# Altium PCB CH564L-R0-1v0.PcbDoc (part 2 of 2)
Units mil, origin at the board's own origin, x right, y up, seen from the top; angles counter-clockwise.
Board outline 2874.02 x 3543.31 mil, 2 copper layers (Top Layer, Bottom Layer); 51 components, 114 nets, 380 pads, 529 vias.
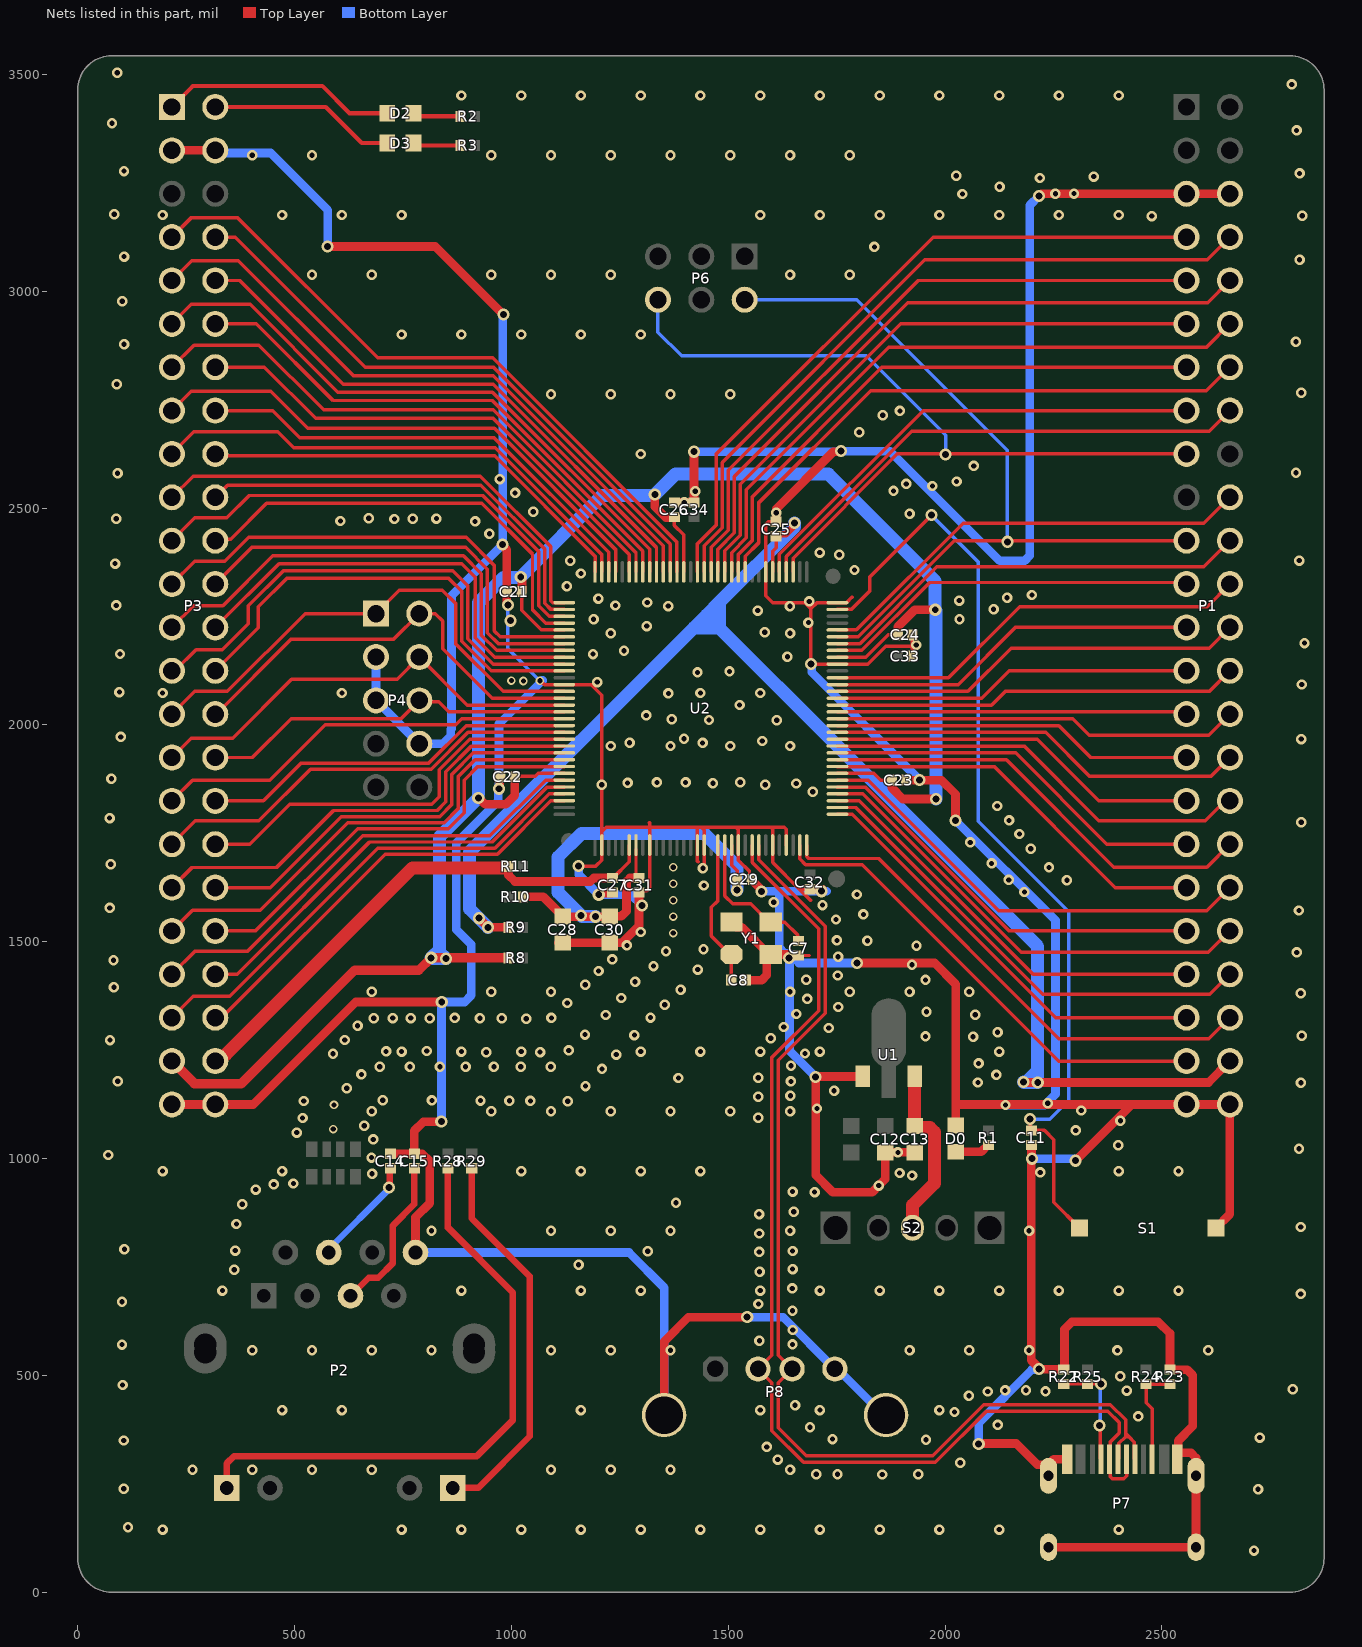
[diagram p2: the nets of this part, all layers, seen from the top]

## Via types
v1: diameter 24, hole 12, Top Layer to Bottom Layer, tented both sides, 447 vias
v2: diameter 28, hole 16, Top Layer to Bottom Layer, tented both sides, 72 vias
v3: diameter 20, hole 12, Top Layer to Bottom Layer, tented both sides, 10 vias

## Nets (pads, with @x,y where several pads share a name; then routed paths per layer and width w, separated by ;. In a path a pad name is that pad's centre, name@x,y a point inside that pad or via, vN(x,y) a via of type N, cw(c..) or ccw(c..) an arc to the next point about the centre after c; other vN are vias at no path point) (continued)
GND: C7.1 C8.1 C11.1 C12.2 C13.2 C14.1 C15.2 C21.1 C22.1 C23.2 C24.2 C25.2 C26.2 C27.1 C28.1 C29.1 C30.1 C31.1 C32.1 C33.2 C34.2 D0.2 P1.5 P1.6 P1.47 P1.48 P2.8 P3.3 P3.4 P3.47 P3.48 P4.3 P4.5 P4.8 P7.0 P7.A1 P7.B1 P8.0 P8.4 R22.2 R23.2 S1.2 U1.1 U2.2 U2.9 U2.16 U2.17 U2.22 U2.27 U2.29 U2.55 U2.64 U2.71 U2.109 Y1.2 Y1.4 | length 19821.6
  Top Layer w8: v3(1065.73,2101.79) 1067.79,2101.79 1076.42,2093.16 U2.109@1122.05,2093.16 1184.38,2093.16 1208.66,2068.88 1208.66,1753.51 ; v2(1155.07,1674.74) 1194.97,1674.74 1208.66,1688.44 U2.2@1208.66,1723.08 1208.66,1753.51 ; C31.1@1295.77,1615.42 1298.18,1617.84 1312.67,1617.84 1318.9,1624.07 U2.9@1318.9,1723.08 1318.9,1763.84 ; 1318.32,1774.93 1318.9,1774.35 1318.9,1763.84 ; 1431.01,1684.18 1429.13,1686.06 U2.16@1429.13,1723.08 1429.13,1763.84 ; v1@1444.74,1677.95 1444.88,1678.1 U2.17@1444.88,1723.08 1444.88,1757.47 1438.51,1763.84 ; C29.1@1553.91,1643.87 1549.11,1648.68 1549.11,1662.27 1523.62,1687.76 U2.22@1523.62,1723.08 1523.62,1758.2 1517.98,1763.84 ; C25.2@1610.59,2468.41 1592.2,2468.41 1586.61,2462.83 U2.71@1586.61,2353 1586.61,2298.42 1602.96,2282.07 1676.98,2282.07 1690.8,2268.26 ; U2.29@1633.86,1723.08 1633.86,1759.16 1629.17,1763.84 1597.68,1763.84 ; C7.1@1662.32,1468.41 1687.32,1468.41 ; C32.1@1688.24,1621.15 1664.12,1621.15 ; 1690.18,1595.33 1689.94,1595.33 1664.12,1621.15 ; 1786.18,2294.34 1785.11,2294.34 1772.9,2282.13 U2.64@1751.97,2282.13 1704.67,2282.13 1690.8,2268.26 ; C33.2@1924.6,2158.79 v1@1924.6,2183.22 ; C24.2@1924.6,2207.66 v1@1924.6,2183.22 ; 1208.66,1753.51 1219,1763.84 1318.9,1763.84 ; 1318.9,1763.84 1429.13,1763.84 ; 1429.13,1763.84 1438.51,1763.84 ; 1438.51,1763.84 1517.98,1763.84 ; 1517.98,1763.84 1597.68,1763.84 ; 1597.68,1763.84 1602.36,1759.16 U2.27@1602.36,1723.08 1602.36,1682.91 1664.12,1621.15 ; 1690.8,2268.26 v2(1690.8,2140.38) U2.55@1751.97,2140.4 1822.18,2140.4 1863.36,2181.59 1922.96,2181.59 v1@1924.6,2183.22
  Top Layer w20: P3.47@217.17,1125 P3.48@317.17,1125 404.94,1125 641.27,1361.34 v2(839.51,1361.34) ; P3.3@217.17,3325 P3.4@317.17,3325 ; v2(576.31,3103.49) 824.76,3103.49 v2(981.98,2946.26) ; C14.1@721.24,1011.19 C15.2@776.24,1011.19 ; P2.8@778.98,783.58 778.98,864.62 811.48,897.12 811.48,993.82 794.11,1011.19 C15.2@776.24,1011.19 ; v2(838.45,1085.33) 797.29,1085.33 776.24,1064.28 C15.2@776.24,1011.19 ; v2(971.31,1852.9) 972.84,1854.43 972.84,1878.36 C22.1@974.53,1880.05 ; v2(979.91,2416) 979.91,2413.84 989.53,2404.22 989.53,2308.13 C21.1@990.02,2307.64 ; C21.1@989.53,2307.64 989.53,2279.67 v2(992.13,2277.07) ; C28.1@1108.51,1497.98 C28.1@1118.7,1497.98 C30.1@1227.08,1497.98 1254.95,1497.98 1294.27,1537.3 C31.1@1294.27,1613.74 ; v2(1201.51,1608.61) 1203.68,1608.61 1207,1611.93 1231.46,1611.93 C27.1@1233.27,1613.74 ; P8.0@1352.24,408.7 1352.24,578.25 1408.54,634.56 v2(1543.84,634.56) ; C26.2@1375.94,2513.21 v1(1398.56,2513.21) C34.2@1421.18,2513.21 1421.18,2630.01 v2(1421.35,2630.17) ; Y1.4@1507.48,1545.47 1519.14,1533.82 1530.95,1533.82 1594.1,1470.67 Y1.2@1598.03,1470.67 ; C8.1@1540.43,1411.56 1577.45,1411.56 1589.16,1423.28 1589.16,1461.8 Y1.2@1598.03,1470.67 ; C29.1@1553.91,1643.87 1553.91,1642.89 1576.77,1620.03 v2(1576.77,1615.62) ; C25.2@1610.59,2468.41 v1(1610.59,2489.22) 1610.59,2498.12 1742.48,2630.01 1758.55,2630.01 v2(1760.08,2631.54) ; v2@1637.63,1470.67 Y1.2@1598.03,1470.67 ; C32.1@1688.24,1621.15 v2@1717.48,1621.15 ; v2(1796.75,1451.24) 1976,1451.24 2025,1402.25 2025,1127.71 ; U1.1@1810,1190 1809.23,1189.22 1702.49,1189.22 v2(1701.71,1188.45) 1701.71,962.22 1741.18,922.75 1831.9,922.75 v1(1846.95,937.8) 1862,952.85 C12.2@1862,1014.37 v1(1891.29,1014.37) C13.2@1930,1014.37 ; C23.2@1910.56,1872.78 v2(1941.56,1872.78) 1992.09,1872.78 2024.25,1840.62 v2(2024.25,1779.82) ; D0.2@2025,1076.38 2025,1127.71 ; v2(2077.7,342.33) 2078.62,343.25 2164,343.25 2213.38,293.86 2229.79,293.86 P7.0@2238.74,284.92 ; v2(2200.59,999.86) 2199.78,1000.66 2199.78,1030.73 C11.1@2198.97,1031.54 2198.97,535.07 2217.51,516.53 2217.51,514.37 2272.84,514.37 R22.2@2273.74,513.46 2275.38,515.1 2275.38,606.81 2292.67,624.09 2491.19,624.09 2518.74,596.55 R23.2@2518.74,513.46 2558.33,513.46 2571.5,500.29 2571.5,383.3 2537.6,349.4 P7.B1@2537.6,321.52 ; v2(2216.91,3219.9) 2222.01,3225 P1.5@2556.85,3225 P1.6@2656.85,3225 ; P7.0@2238.74,103.94 P7.0@2578.9,103.94 2578.9,309.8 2567.18,321.52 P7.B1@2537.6,321.52 ; P7.0@2238.74,268.5 P7.0@2238.74,284.92 ; P7.A1@2281.85,306.69 2250.92,306.69 2238.74,294.51 P7.0@2238.74,284.92 ; v2(2300.72,995.24) 2430.48,1125 ; P7.B1@2535.79,306.69 2535.79,319.71 P7.B1@2537.6,321.52 ; S1.2@2625,840 2656.85,871.85 P1.48@2656.85,1125 P1.47@2556.85,1125 2430.48,1125 ; 2025,1127.71 2027.71,1125 2430.48,1125
  Bottom Layer w8: v2(992.13,2277.07) 992.13,2175.39 v3@1061.81,2105.71
  Bottom Layer w20: P3.4@317.17,3325 323.37,3318.79 444.84,3318.79 576.31,3187.32 v2(576.31,3103.49) ; P4.3@687.72,2156.77 P4.5@687.72,2056.77 P4.8@787.72,1956.77 842.59,1956.77 860.18,1974.36 860.18,1989.77 861.99,1991.59 861.99,2298.08 v2(979.91,2416) 979.91,2944.19 v2(981.98,2946.26) ; P2.8@778.98,783.58 1271.17,783.58 1352.24,702.51 P8.0@1352.24,408.7 ; v2(838.45,1085.33) 838.98,1085.86 838.98,1360.81 v2(839.51,1361.34) 892.63,1361.34 907.73,1376.44 907.73,1493.6 872.95,1528.38 872.95,1727.91 969.94,1824.9 969.94,1851.52 v2(971.31,1852.9) 971.31,2002.2 v3@1071.81,2102.71 ; v2(1155.07,1674.74) 1155.07,1655.05 v2(1201.51,1608.61) 1276.73,1608.61 v2(1301.47,1583.87) ; v2(1421.35,2630.17) 1758.71,2630.17 v2(1760.08,2631.54) 1873.32,2631.54 2125.84,2379.02 2183.65,2379.02 2195.36,2390.73 2195.36,3198.36 v2(2216.91,3219.9) ; v2(1543.84,634.56) 1626.38,634.56 P8.4@1745.94,515 1751.84,515 1858.14,408.7 P8.0@1864.05,408.7 ; v2(1576.77,1615.62) 1577.85,1616.7 1617.72,1616.7 ; v2(1690.8,2140.38) 1692.33,2138.85 1692.33,2122.02 v2(1941.56,1872.78) ; v2(1701.71,1188.45) 1641.43,1248.74 v2@1641.43,1472.85 ; v2@1727.09,1616.7 v2(1715.09,1616.7) 1617.72,1616.7 ; v2(1796.75,1451.24) 1663.03,1451.24 v2@1641.43,1472.85 ; v2(2024.25,1779.82) 2254.62,1549.45 2254.62,1148.32 2229.78,1123.48 2139.63,1123.48 v1(2139.46,1123.66) ; v2(2077.7,342.33) 2077.7,391.08 2200.36,513.74 2215.08,513.74 v2(2216.61,515.27) ; v2(2200.59,999.86) 2296.11,999.86 v2(2300.72,995.24) ; 1617.72,1616.7 1617.72,1486.32 1631.19,1472.85 v2@1641.43,1472.85
  other v1: 2712.58,96.23 195.79,144.57 746.97,144.57 884.77,144.57 1022.56,144.57 1160.36,144.57 1298.15,144.57 1435.95,144.57 1573.74,144.57 1711.54,144.57 1849.33,144.57 1987.13,144.57 2124.92,144.57 2400.51,144.57 116.04,149.74 2721.88,237.66 106.3,238.77 1703.11,272.1 1752.12,272.1 1855.32,271.58 1938.39,272.1 264.69,282.36 402.48,282.36 540.28,282.36 678.07,282.36 1091.46,282.36 1229.25,282.36 1367.05,282.36 1642.64,282.36 2035.03,298.58 1614.16,305.91 1588.77,335.25 106.3,350.06 1956.05,351.61 1740.53,353.3 2725.6,356.75 1688.63,380.39 2121.61,385.87 2445.79,405.55 2021.95,415.76 471.38,420.16 609.17,420.16 1160.36,420.16 1573.74,420.16 1711.54,420.16 1987.13,420.16 1654.22,431.16 2055.13,452.99 2098.62,462.94 2231.7,463.31 2418.85,465.09 2138.44,465.52 2186.73,465.89 2801.9,468.4 103.52,478.04 2404.07,498.11 402.48,557.95 540.28,557.95 678.07,557.95 815.87,557.95 1091.46,557.95 1229.25,557.95 1367.05,557.95 1918.23,557.95 2056.02,557.95 2193.82,557.95 2397.55,557.65 2607.21,557.95 102.12,571.24 1648.23,571.61 1571.92,580.16 1648.68,604.84 1648.23,649.16 1569.69,664.7 102.12,670.01 2820.5,687.97 333.58,695.75 884.77,695.75 1160.36,695.75 1298.15,695.75 1573.74,695.75 1711.54,695.75 1849.33,695.75 1987.13,695.75 2124.92,695.75 2262.72,695.75 2400.51,695.75 2538.31,695.75 1647.65,700.73 1572.36,739 361.04,743.87 1648.46,745.31 1155.09,755.1 1571.47,784.83 1314.62,786.57 1648.46,787.09 363.49,788.01 107.69,791.03 1571.58,827.4 815.87,833.54 1091.46,833.54 1229.25,833.54 1367.05,833.54 1642.64,833.54 2193.82,833.54 2820.5,842.42 365.95,849.3 1571.17,872.16 1651.27,877.46 379.4,894.62 1379.73,898.34 1699.34,922.71 1648.46,924.05 410.61,928.49 452.02,940.66 497.42,942.69 1924.07,961.07 678.93,965.11 1895.19,966.8 2219.8,968.27 195.79,971.34 471.38,971.34 1022.56,971.34 1160.36,971.34 1298.15,971.34 1435.95,971.34 2400.51,971.34 2538.31,971.34 677.42,1002.49 70.49,1008.34 2816.38,1022.6 2399.45,1030.9 681.57,1044.4 505.14,1060.07 2301.53,1065.02 660.87,1075.79 2404.33,1087.49 518.49,1093.62 1569.39,1094.16 678.07,1109.13 953.66,1109.13 1091.46,1109.13 1229.25,1109.13 1367.05,1109.13 1504.84,1109.13 1642.64,1109.13 2314.34,1110.97 1704.79,1115.67 2237.02,1127.57 1130.2,1132.1 521.15,1132.9 995.51,1133.44 1043.89,1133.21 816.65,1134.34 928.83,1133.89 703.29,1134.68 1569.39,1142.84 1643.54,1144.89 1744.24,1156.41 620.44,1162.08 1170.96,1167.29 2820.72,1174.75 2075.79,1175.63 92.12,1178.21 1644.66,1178.09 1385.16,1185.93 1569.08,1186.6 2118.59,1193.18 654.12,1194.19 1208.92,1206.99 696.57,1211.93 765.92,1211.93 835.27,1211.93 894.42,1211.93 959.7,1211.93 1021.57,1211.93 1090.92,1211.93 1644.73,1214.32 2077.44,1219.52 1241.9,1239.96 588.78,1241.81 1677.21,1242.45 941.92,1245.16 1066.26,1245.62 711.13,1247.3 746.97,1246.93 884.77,1246.93 1022.56,1246.93 1298.15,1246.93 1435.95,1246.93 1573.74,1246.93 1711.54,1246.93 2124.92,1246.93 805.08,1248.16 1132.49,1249.62 74.46,1273.23 615.71,1273.59 1598.1,1277.76 2064.82,1280.97 1954.94,1281.95 2822.59,1283.43 1283.78,1284.96 1169.78,1286.02 2121.34,1291.4 1731.88,1301.27 1628.11,1303.59 645.45,1306.38 1034.51,1322.48 811.85,1323.49 927.35,1323.49 977.94,1323.49 682.44,1323.54 726.5,1324 767.9,1324 869.6,1324.51 1092.41,1324.54 1320.91,1325.32 1217.78,1331.24 2069.76,1332 1657.26,1333.52 1957.21,1338.67 1753.98,1349.7 1353.88,1354.63 1128.93,1358.81 1682.29,1368.35 1253.48,1370.51 2820.1,1381.55 678.07,1384.72 953.66,1384.72 1091.46,1384.72 1642.64,1384.72 1780.43,1384.72 1918.23,1384.72 2056.02,1384.72 1390.19,1389.61 83.36,1395.37 1170.41,1400.74 1285.21,1407.79 1955.08,1412.11 1679.97,1412.73 1752.46,1422.33 1201.07,1432.75 1429.83,1435.91 1327.66,1443.89 1923.81,1447.22 82.55,1457.65 1232.63,1459.35 1753.44,1465.4 2811.18,1475.51 1356.61,1478 1443.05,1482.98 1934.24,1491.12 1266.44,1491.81 1750.73,1503.26 1820.93,1502.64 1298.15,1522.52 1748.63,1551.35 1811.85,1563.17 2816.14,1572.22 73.66,1578.16 1717.37,1584.71 1604.92,1591.39 1796.72,1609.18 2183.15,1614.94 1444.04,1629.84 2281.05,1641.95 2146.91,1642.82 1441.72,1669.54 2239.69,1671.66 76.32,1679.03 2107.32,1680.73 2197.74,1714.77 2058.26,1729.23 2171.53,1748.55 2821.47,1775.63 2147.64,1780.01 73.49,1785.32 2120.26,1813.22 1695.06,1846.12 1208.5,1862.16 1585.57,1862.26 1656.81,1865.07 1268.01,1866.38 1464.71,1865.54 1335.55,1867.65 1401.82,1867.65 1527.6,1868.07 77.74,1876.03 1229.25,1951.57 1367.05,1951.57 1504.84,1951.57 1642.64,1951.57 1272.53,1959.24 1440.99,1958.76 1578.56,1962.98 2821.59,1967.46 1398.18,1968.24 99,1972.4 1612.14,2010.8 1455.67,2011.55 1369.91,2013.06 1310.83,2022.15 1526.38,2046.16 1362.12,2072.76 195.79,2073.7 609.17,2073.7 1435.95,2073.7 1573.74,2073.7 96.16,2075.86 2822.51,2093.28 1197.9,2098.77 1429.14,2121.31 1503.06,2123.64 1636.63,2157.52 1188.27,2163.44 97.58,2163.72 1259.82,2171.01 1933.83,2184.32 2828.94,2188.79 1229.25,2211.5 1642.64,2211.5 1584.06,2213.74 1312.11,2228.11 1685.04,2236.12 1189.65,2243.93 2033.41,2243.87 1567.93,2263.71 2111.91,2266.76 1361.64,2274.2 1642.36,2273.6 89.08,2275.69 1239.87,2275.58 1313.48,2282.46 1687.12,2285.05 2032.94,2286.85 1200.66,2291.4 2143.22,2293.4 2200.3,2299.72 1128.03,2319.78 1160.36,2349.29 1791.16,2357.44 86.24,2372.06 1135.72,2378.92 2816.69,2379.02 1756.16,2392.69 1710.92,2397.44 949.43,2441.02 916.31,2469.4 605.73,2470.46 730.28,2474.91 772.54,2475.47 89.08,2475.51 827.03,2476.02 671.34,2476.58 1918.23,2487.09 1050.56,2491.88 1008.57,2535.05 1423.92,2538.87 1881.26,2539.81 1970.93,2551.14 1910.52,2555.86 2026.62,2561.52 973.09,2566.98 91.91,2580.39 2809.32,2581.72 2066.26,2597.39 1298.15,2624.88 1802.03,2675.01 1856.3,2714.28 1895.94,2724.28 1091.46,2762.68 1229.25,2762.68 1367.05,2762.68 1504.84,2762.68 2821.61,2765.99 90.15,2785.58 106.99,2878.16 2809.05,2883.7 746.97,2900.47 884.77,2900.47 1022.56,2900.47 1160.36,2900.47 1298.15,2900.47 102.78,2977.06 540.28,3038.27 678.07,3038.27 953.66,3038.27 1091.46,3038.27 1229.25,3038.27 1642.64,3038.27 1780.43,3038.27 2817.63,3072.93 106.99,3080.16 1837.21,3102.5 2476.66,3173.37 2823.83,3174.37 195.79,3176.06 471.38,3176.06 609.17,3176.06 746.97,3176.06 1573.74,3176.06 1711.54,3176.06 1849.33,3176.06 1987.13,3176.06 2124.92,3176.06 2262.72,3176.06 2400.51,3176.06 84.25,3177.76 2040.13,3224.43 2254.43,3224.9 2297.35,3225.33 2125.76,3241.19 2218.85,3261.24 2342.89,3264.64 2026,3266.34 2817.63,3271.93 106.66,3277.19 402.48,3313.86 540.28,3313.86 953.66,3313.86 1091.46,3313.86 1229.25,3313.86 1367.05,3313.86 1504.84,3313.86 1642.64,3313.86 1780.43,3313.86 2810.66,3371.05 79.08,3387.41 884.77,3451.65 1022.56,3451.65 1160.36,3451.65 1298.15,3451.65 1435.95,3451.65 1573.74,3451.65 1711.54,3451.65 1849.33,3451.65 1987.13,3451.65 2124.92,3451.65 2262.72,3451.65 2400.51,3451.65 2799.72,3477.07 91.38,3504.27
  other v2: 1640.43,1462.85 998.03,2240.47
  other v3: 589.43,1068 591.15,1124 1373.25,1520.04 1373.25,1558.02 1373.25,1596 1373.25,1633.98 1373.25,1671.96 999.99,2102.29 1027.68,2101.51
LED1: D2.2 P3.1 | length 542.8
  Top Layer w10: P3.1@217.17,3425 265.63,3473.47 564.16,3473.47 626.8,3410.84 D2.2@713.91,3410.84
LED2: D3.2 P3.2 | length 431.1
  Top Layer w10: P3.2@317.17,3425 571.92,3425 654.9,3342.02 D3.2@713.91,3342.02
NetC13_1: C13.1 S2.1 U1.3 | length 407.7
  Top Layer w30: S2.1@1925,840.45 1925,892.5 1975.21,942.71 1975.21,1061.52 1965.04,1071.69 1933.31,1071.69 C13.1@1930,1075 U1.3@1930,1190
NetC14_2: C14.2 P2.4 | length 253.1
  Top Layer w15: v2(717.88,933.69) 719.56,935.37 719.56,976.05 C14.2@721.24,977.73
  Bottom Layer w15: P2.4@578.98,783.58 578.98,791.27 717.88,930.18 v2(717.88,933.69)
NetC15_1: C15.1 P2.5 | length 368.2
  Top Layer w15: P2.5@628.98,683.58 670.93,725.53 693.24,725.53 726.76,759.06 726.76,845.64 776.24,895.12 C15.1@776.24,977.73
NetD0_1: D0.1 R1.1 | length 81.5
  Top Layer w20: D0.1@2025,1015.75 2083.23,1015.75 2099.02,1031.54 R1.1@2100,1031.54
NetD2_1: D2.1 R2.2 | length 111.4
  Top Layer w10: D2.1@774.54,3410.84 781.91,3403.46 R2.2@882.84,3403.46
NetD3_1: D3.1 R3.2 | length 110.7
  Top Layer w10: D3.1@774.54,3342.02 780.27,3336.29 R3.2@882.84,3336.29
NetP2_9: P2.9 R28.2 | length 1400.7
  Top Layer w15: P2.9@343.35,240.59 343.35,296.69 360.8,314.14 920.71,314.14 1003.56,396.99 1003.56,690.98 853.6,840.94 R28.2@853.6,977.73
NetP2_12: P2.12 R29.2 | length 900.1
  Top Layer w15: P2.12@865,240.59 923.33,240.59 1042.32,359.58 1042.32,728.4 908.6,862.11 R29.2@908.6,977.73
NetP7_A5: P7.A5 R22.1 R25.1 | length 262.6
  Top Layer w8: R22.1@2273.74,480 2274.04,480.3 v2(2359.62,480.3) ; v2(2356.03,384.38) 2357.82,382.59 2357.82,308.48 P7.A5@2359.61,306.69
  Bottom Layer w8: v2(2356.03,384.38) 2357.82,386.17 2357.82,478.51 v2(2359.62,480.3)
NetP7_B5: P7.B5 R23.1 R24.2 | length 234.1
  Top Layer w8: P7.B5@2477.72,306.69 2477.72,423.16 2463.74,437.14 R24.2@2463.74,480 R23.1@2518.74,480
NRST: C11.2 S1.1 U2.63 | length 2229.5
  Top Layer w8: U2.63@1751.97,2266.39 1783.68,2266.39 1826.14,2308.84 1826.14,2341.3 v2(1968.71,2483.86) ; v2(2196,1091) 2196,1068.75 2195.61,1068.36 C11.2@2198.97,1065 2229.32,1065 2250.86,1043.45 2250.86,899.17 S1.1@2310.04,840
  Bottom Layer w8: v2(1968.71,2483.86) 2076.68,2375.89 2076.68,1778 2285.01,1569.68 2285.01,1134.67 2241.34,1091 v2(2196,1091)
PA0: P3.7 U2.84 | length 1562
  Top Layer w8: P3.7@217.17,3125 262.33,3170.17 368.29,3170.17 691.9,2846.56 956.75,2846.56 1381.89,2421.42 U2.84@1381.89,2353
PA1: P3.8 U2.85 | length 1406.5
  Top Layer w8: P3.8@317.17,3125 362.99,3125 663.32,2824.67 958.84,2824.67 1366.14,2417.37 U2.85@1366.14,2353
PA2: P3.9 U2.86 | length 1484.8
  Top Layer w8: P3.9@217.17,3025 262.91,3070.75 370.39,3070.75 635.88,2805.26 958.45,2805.26 1350.39,2413.32 U2.86@1350.39,2353
PA3: P3.10 U2.87 | length 1328.8
  Top Layer w8: P3.10@317.17,3025 373.49,3025 612.69,2785.79 958.12,2785.79 1334.65,2409.27 U2.87@1334.65,2353
PA4: P3.11 U2.88 | length 1406.4
  Top Layer w8: P3.11@217.17,2925 262.02,2969.86 397.39,2969.86 599.58,2767.67 956.45,2767.67 1318.9,2405.22 U2.88@1318.9,2353
PA5: P3.12 U2.89 | length 1251.1
  Top Layer w8: P3.12@317.17,2925 411.9,2925 588.69,2748.22 956.1,2748.22 1303.15,2401.16 U2.89@1303.15,2353
PA6: P3.13 U2.90 | length 1333.9
  Top Layer w8: P3.13@217.17,2825 268.22,2876.06 417.9,2876.06 567.26,2726.7 957.81,2726.7 1287.4,2397.11 U2.90@1287.4,2353
PA7: P3.14 U2.91 | length 1173.5
  Top Layer w8: P3.14@317.17,2825 430.52,2825 548.49,2707.03 957.69,2707.03 1271.65,2393.06 U2.91@1271.65,2353
PA8: P3.19 U2.97 | length 1119.1
  Top Layer w8: P3.19@217.17,2525 266.1,2573.94 928.37,2573.94 1090.71,2411.6 1090.71,2286.82 1095.4,2282.13 U2.97@1122.05,2282.13
PA9: P3.20 U2.98 | length 1008.5
  Top Layer w8: P3.20@317.17,2525 345.44,2553.27 929.24,2553.27 1076.71,2405.8 1076.71,2281.02 1091.34,2266.39 U2.98@1122.05,2266.39
PA10: P3.21 U2.99 | length 1136.5
  Top Layer w8: P3.21@217.17,2425 269.83,2477.66 344.04,2477.66 395.53,2529.15 933.56,2529.15 1062.71,2400 1062.71,2275.22 1087.29,2250.64 U2.99@1122.05,2250.64
PA11: P3.22 U2.100 | length 1030.5
  Top Layer w8: P3.22@317.17,2425 320.78,2428.61 352.77,2428.61 435.35,2511.2 931.71,2511.2 1048.71,2394.2 1048.71,2265.36 1079.18,2234.89 U2.100@1122.05,2234.89
PA12: P3.15 U2.93 | length 1244
  Top Layer w8: P3.15@217.17,2725 261.37,2769.21 445.45,2769.21 530.73,2683.93 960.99,2683.93 1240.16,2404.76 U2.93@1240.16,2353
PA13: P3.16 U2.94 | length 1087.9
  Top Layer w8: P3.16@317.17,2725 449.6,2725 511.9,2662.7 959.98,2662.7 1224.41,2398.27 U2.94@1224.41,2353
PA14: P3.17 U2.95 | length 1169.8
  Top Layer w8: P3.17@217.17,2625 267.94,2675.77 460.96,2675.77 497.73,2639 962.89,2639 1208.66,2393.23 U2.95@1208.66,2353
PA15: P3.18 U2.96 | length 1009.6
  Top Layer w8: P3.18@317.17,2625 321.73,2620.44 961.65,2620.44 1192.91,2389.18 U2.96@1192.91,2353
PA16: P3.23 U2.102 | length 1133.2
  Top Layer w8: P3.23@217.17,2325 269.61,2377.44 338.91,2377.44 394.47,2433 895.72,2433 960.87,2367.85 960.87,2216.81 974.28,2203.39 U2.102@1122.05,2203.39
PA17: P3.24 U2.103 | length 1017.6
  Top Layer w8: P3.24@317.17,2325 401.8,2409.64 894.57,2409.64 944.75,2359.47 944.75,2213.13 970.23,2187.65 U2.103@1122.05,2187.65
PA18: P3.25 U2.104 | length 1146.6
  Top Layer w8: P3.25@217.17,2225 267.17,2275 334.94,2275 450.04,2390.1 889.61,2390.1 930.75,2348.97 930.75,2207.33 966.18,2171.9 U2.104@1122.05,2171.9
PA19: P3.26 U2.105 | length 1036.9
  Top Layer w8: P3.26@317.17,2225 464.26,2372.1 885.48,2372.1 916.75,2340.84 916.75,2201.53 962.13,2156.15 U2.105@1122.05,2156.15
PA20: P3.27 U2.106 | length 1185.2
  Top Layer w8: P3.27@217.17,2125 224.12,2125 272.81,2173.69 333.6,2173.69 393.62,2233.71 393.62,2274.99 474.47,2355.84 864.36,2355.84 899.24,2320.96 899.24,2199.24 958.08,2140.4 U2.106@1122.05,2140.4
PA21: P3.28 U2.107 | length 1076.8
  Top Layer w8: P3.28@317.17,2125 416.53,2224.37 416.53,2272.54 481.84,2337.84 855.57,2337.84 885.24,2308.17 885.24,2193.44 954.03,2124.65 U2.107@1122.05,2124.65
PB0: P1.29 U2.48 | length 807
  Top Layer w8: U2.48@1751.97,2030.17 2551.68,2030.17 P1.29@2556.85,2025
PB1: P1.28 U2.49 | length 937.6
  Top Layer w8: U2.49@1751.97,2045.91 1826.2,2045.91 2107.13,2045.91 2138.51,2077.29 2609.14,2077.29 P1.28@2656.85,2125
PB2: P1.27 U2.50 | length 831.1
  Top Layer w8: U2.50@1751.97,2061.66 2084.47,2061.66 2147.81,2125 P1.27@2556.85,2125
PB3: P1.26 U2.51 | length 966
  Top Layer w8: U2.51@1751.97,2077.41 2052.87,2077.41 2152.62,2177.16 2609.01,2177.16 P1.26@2656.85,2225
PB4: P1.25 U2.52 | length 859.5
  Top Layer w8: U2.52@1751.97,2093.16 1838.35,2093.16 2030.6,2093.16 2162.44,2225 P1.25@2556.85,2225
PB5: P1.24 U2.53 | length 994.4
  Top Layer w8: U2.53@1751.97,2108.91 2007.95,2108.91 2171.91,2272.87 2604.72,2272.87 P1.24@2656.85,2325
PB6: P1.23 U2.57 | length 871.3
  Top Layer w8: U2.57@1751.97,2171.9 1807.99,2171.9 1964.68,2328.59 2553.26,2328.59 P1.23@2556.85,2325
PB7: P1.22 U2.58 | length 1003.2
  Top Layer w8: U2.58@1751.97,2187.65 1803.94,2187.65 1981.29,2365 2596.85,2365 P1.22@2656.85,2425
PB8: P3.29 P4.1 U2.110 | length 1158.4
  Top Layer w8: P3.29@217.17,2025 269.58,2077.41 345.24,2077.41 524.6,2256.77 P4.1@672.14,2256.77 ; P4.1@687.72,2256.77 741.47,2310.52 841.03,2310.52 871.24,2280.31 871.24,2187.64 981.47,2077.41 U2.110@1122.05,2077.41
PB9: P3.30 P4.2 U2.111 | length 1019.4
  Top Layer w8: P3.30@317.17,2025 319.03,2025 492.2,2198.17 729.12,2198.17 P4.2@787.72,2256.77 824.91,2256.77 841.94,2239.73 841.94,2175.42 955.7,2061.66 1040.72,2061.66 U2.111@1122.05,2061.66
PB10: P3.31 P4.4 U2.112 | length 1046.8
  Top Layer w8: P3.31@217.17,1925 261.93,1969.77 357.05,1969.77 493.07,2105.79 736.74,2105.79 P4.4@787.72,2156.77 898.58,2045.91 U2.112@1122.05,2045.91
PB11: P3.32 P4.6 U2.113 | length 870.5
  Top Layer w8: P3.32@317.17,1925 402.82,1925 492.37,2014.54 745.49,2014.54 P4.6@787.72,2056.77 790.67,2053.82 832.26,2053.82 855.92,2030.17 U2.113@1122.05,2030.17
PB12: P3.33 U2.114 | length 962.3
  Top Layer w8: P3.33@217.17,1825 264.79,1872.62 442.51,1872.62 570.43,2000.54 871.94,2000.54 885.82,2014.42 U2.114@1101.05,2014.42
PB13: P3.34 U2.115 | length 855.8
  Top Layer w8: P3.34@317.17,1825 428.43,1825 515.71,1912.27 809.53,1912.27 895.86,1998.61 U2.115@1101.05,1998.61
PB14: P3.35 U2.116 | length 1011.7
  Top Layer w8: P3.35@217.17,1725 270.98,1778.81 417.39,1778.81 536.85,1898.27 815.33,1898.27 899.96,1982.9 U2.116@1122.05,1982.92
PB15: P3.36 U2.117 | length 941.9
  Top Layer w8: P3.36@317.17,1725 397.13,1725 488.9,1816.77 816.31,1816.77 833.98,1834.44 833.98,1897.13 904.03,1967.17 U2.117@1122.05,1967.17
PB16: P1.21 P6.2 U2.59 | length 1857.1
  Top Layer w8: U2.59@1751.97,2203.39 1799.89,2203.39 2021.49,2425 2143.72,2425 P1.21@2556.85,2425
  Bottom Layer w8: P6.2@1538.01,2980.64 1796.24,2980.64 2143.72,2633.15 v2(2143.72,2422.39)
PB17: P1.20 U2.60 | length 1031.6
  Top Layer w8: U2.60@1751.97,2219.14 1795.84,2219.14 2041.69,2465 2596.85,2465 P1.20@2656.85,2525
PB20: P1.15 U2.69 | length 1116.7
  Top Layer w8: U2.69@1618.11,2353 1618.11,2393.74 1949.37,2725 P1.15@2556.85,2725
PB21: P1.16 U2.68 | length 1197.9
  Top Layer w8: U2.68@1633.86,2353 1633.86,2388.48 1923,2677.62 2609.47,2677.62 P1.16@2656.85,2725
PB22: P1.17 P6.6 U2.67 | length 1919.4
  Top Layer w8: U2.67@1649.61,2353 1649.61,2384.43 1890.18,2625 P1.17@2556.85,2625
  Bottom Layer w8: P6.6@1338.01,2980.64 1338.01,2905.92 1392.57,2851.36 1818.44,2851.36 2001.24,2668.56 v2(2001.24,2623.75)
PD0: P3.37 U2.118 | length 1080.8
  Top Layer w8: P3.37@217.17,1625 263.48,1671.32 458.45,1671.32 589.9,1802.77 828.85,1802.77 849.01,1822.93 849.01,1892.36 908.08,1951.43 U2.118@1122.05,1951.43
PD1: P3.38 U2.119 | length 974.2
  Top Layer w8: P3.38@317.17,1625 444.2,1625 607.97,1788.77 834.65,1788.77 863.01,1817.13 863.01,1827.02 863.01,1886.56 912.13,1935.68 U2.119@1122.05,1935.68
PD2: P3.39 U2.120 | length 1111.7
  Top Layer w8: P3.39@217.17,1525 264.79,1572.62 420.77,1572.62 622.93,1774.77 844.86,1774.77 877.01,1806.92 877.01,1880.76 916.18,1919.93 U2.120@1122.05,1919.93
PD3: P3.40 U2.121 | length 1005.7
  Top Layer w8: P3.40@317.17,1525 409.79,1525 645.56,1760.77 854.17,1760.77 891.01,1797.61 891.01,1872.29 922.9,1904.18 U2.121@1122.05,1904.18
PD4: P3.41 U2.123 | length 1090.3
  Top Layer w8: P3.41@217.17,1425 270.86,1478.7 391.84,1478.7 657.28,1744.14 950.55,1744.14 1079.1,1872.69 U2.123@1122.05,1872.69
PD5: P3.42 U2.124 | length 983.8
  Top Layer w8: P3.42@317.17,1425 367.69,1425 672.83,1730.14 956.35,1730.14 1083.15,1856.94 U2.124@1122.05,1856.94
PD6: P3.43 U2.125 | length 1118.7
  Top Layer w8: P3.43@217.17,1325 266.62,1374.45 350.23,1374.45 691.91,1716.14 962.15,1716.14 1087.2,1841.19 U2.125@1122.05,1841.19
PD7: P3.44 U2.126 | length 1012.2
  Top Layer w8: P3.44@317.17,1325 331.24,1325 345.47,1339.23 346.33,1339.23 709.23,1702.14 967.95,1702.14 1091.26,1825.44 U2.126@1122.05,1825.44
PD8: P1.14 U2.74 | length 1388.2
  Top Layer w8: U2.74@1539.37,2353 1539.43,2353.06 1539.43,2389.22 1569.96,2419.75 1569.96,2511.94 1828.53,2770.5 2602.35,2770.5 P1.14@2656.85,2825
PD9: P1.13 U2.75 | length 1311.4
  Top Layer w8: U2.75@1523.62,2353 1523.62,2393.21 1555.96,2425.55 1555.96,2526.45 1854.51,2825 P1.13@2556.85,2825
PD10: P1.12 U2.76 | length 1477
  Top Layer w8: U2.76@1507.87,2353 1507.87,2397.26 1541.96,2431.35 1541.96,2542.66 1870.52,2871.21 2603.06,2871.21 P1.12@2656.85,2925
PD11: P1.11 U2.77 | length 1399.2
  Top Layer w8: U2.77@1492.13,2353 1492.13,2401.31 1527.96,2437.15 1527.96,2555.29 1897.68,2925 P1.11@2556.85,2925
PD12: P1.10 U2.78 | length 1565.7
  Top Layer w8: U2.78@1476.38,2353 1476.38,2405.36 1513.96,2442.95 1513.96,2573.01 1914.5,2973.55 2605.4,2973.55 P1.10@2656.85,3025
PD13: P1.9 U2.79 | length 1488.7
  Top Layer w8: U2.79@1460.63,2353 1460.63,2409.41 1499.96,2448.75 1499.96,2587.12 1937.85,3025 P1.9@2556.85,3025
PD14: P1.8 U2.80 | length 1655.4
  Top Layer w8: U2.80@1444.88,2353 1444.88,2413.47 1485.96,2454.55 1485.96,2605.19 1953.4,3072.63 2604.48,3072.63 P1.8@2656.85,3125
PD15: P1.7 U2.81 | length 1581.1
  Top Layer w8: U2.81@1429.13,2353 1429.13,2417.52 1471.96,2460.35 1471.96,2623.93 1973.03,3125 P1.7@2556.85,3125
PD16: P1.45 U2.31 | length 1116.5
  Top Layer w8: U2.31@1665.35,1723.08 1665.35,1691.15 1678.37,1678.13 1808.93,1678.13 2262.06,1225 P1.45@2556.85,1225
PD17: P1.44 U2.32 | length 1196
  Top Layer w8: U2.32@1681.1,1723.08 1681.1,1696.82 1685.79,1692.13 1847,1692.13 2262.37,1276.76 2608.61,1276.76 P1.44@2656.85,1325
PD18: P1.43 U2.33 | length 999.1
  Top Layer w8: U2.33@1751.97,1793.95 1786.03,1793.95 2254.97,1325 P1.43@2556.85,1325
PD19: P1.42 U2.34 | length 1102.4
  Top Layer w8: U2.34@1751.97,1809.69 1794.54,1809.69 2225.34,1378.89 2610.74,1378.89 P1.42@2656.85,1425
PD20: P1.41 U2.35 | length 970.8
  Top Layer w8: U2.35@1751.97,1825.44 1802.49,1825.44 2202.93,1425 P1.41@2556.85,1425
PD21: P1.40 U2.36 | length 1076.8
  Top Layer w8: U2.36@1751.97,1841.19 1810.33,1841.19 2175.95,1475.56 2607.41,1475.56 P1.40@2656.85,1525
PD22: P1.39 U2.37 | length 942.4
  Top Layer w8: U2.37@1751.97,1856.94 1816.4,1856.94 2148.34,1525 P1.39@2556.85,1525
PD23: P1.38 U2.38 | length 1051.5
  Top Layer w8: U2.38@1751.97,1872.69 1822.94,1872.69 2123.77,1571.86 2603.71,1571.86 P1.38@2656.85,1625
PD24: P1.37 U2.40 | length 920.5
  Top Layer w8: U2.40@1751.97,1904.18 2113.19,1904.18 2392.37,1625 P1.37@2556.85,1625
PD25: P1.36 U2.41 | length 1029.4
  Top Layer w8: U2.41@1751.97,1919.93 2141.71,1919.93 2389.46,1672.18 2604.03,1672.18 P1.36@2656.85,1725
PD26: P1.35 U2.42 | length 892.1
  Top Layer w8: U2.42@1751.97,1935.68 2162.67,1935.68 2373.34,1725 P1.35@2556.85,1725
PD27: P1.34 U2.43 | length 994.9
  Top Layer w8: U2.43@1751.97,1951.43 2183.04,1951.43 2354.95,1779.51 2600.5,1779.51 2645.99,1825 P1.34@2656.85,1825
PD28: P1.33 U2.44 | length 863.8
  Top Layer w8: U2.44@1751.97,1967.17 2212.73,1967.17 2354.9,1825 P1.33@2556.85,1825
PD29: P1.32 U2.45 | length 965.1
  Top Layer w8: U2.45@1751.97,1982.92 2232.51,1982.92 2334.19,1881.25 2613.1,1881.25 P1.32@2656.85,1925
PD30: P1.31 U2.46 | length 835.4
  Top Layer w8: U2.46@1751.97,1998.67 2262.79,1998.67 2336.46,1925 P1.31@2556.85,1925
PD31: P1.30 U2.47 | length 940.9
  Top Layer w8: U2.47@1751.97,2014.42 2294.81,2014.42 2333.01,1976.22 2608.07,1976.22 P1.30@2656.85,2025
PDM: P7.A7 P7.B7 P8.2 U2.24 | length 2590.5
  Top Layer w8: U2.24@1555.12,1723.08 1555.12,1702.14 1555.87,1701.39 1555.87,1682.98 1708.81,1530.04 1708.81,1341.42 1600.64,1233.24 1600.64,546.87 P8.2@1568.77,515 1600.64,483.13 1600.64,372.91 1673.67,299.88 1977.64,299.88 2095.66,417.89 2374.85,417.89 2401.32,391.43 2401.32,367.27 2380.68,346.63 2380.68,308.08 P7.B7@2379.29,306.69 2381.12,304.87 2381.12,266.93 2385.8,262.24 2412.42,262.24 2418.66,268.48 P7.A7@2418.66,306.69
PDP: P7.A6 P7.B6 P8.3 U2.25 | length 2547.8
  Top Layer w8: U2.25@1570.87,1723.08 1570.87,1689.2 1723.81,1536.25 1723.81,1335.2 1615.64,1227.03 1615.64,546.87 P8.3@1647.51,515 1615.64,483.13 1615.64,379.12 1679.88,314.88 1971.43,314.88 2089.44,432.89 2381.07,432.89 2416.32,397.64 2416.32,366.81 ; P7.A6@2398.98,306.69 2400.88,308.6 2400.88,343.41 2416.32,358.85 ; 2426.52,356.6 2424.28,358.85 ; P7.B6@2438.35,306.69 2436.73,308.31 2436.73,346.4 2424.28,358.85 ; 2416.32,358.85 2424.28,358.85 ; 2416.32,358.85 2416.32,366.81 ; 2416.32,366.81 2424.28,358.85
V5: C27.2 P3.46 R11.1 U2.6 | length 1218.2
  Top Layer w8: C27.2@1233.27,1647.2 1234.26,1647.2 1271.65,1684.6 U2.6@1271.65,1723.08
  Top Layer w20: R11.1@993.4,1674.03 993.4,1653.72 1008.13,1638.99 1181.88,1638.99 1190.1,1647.2 C27.2@1233.27,1647.2
  Top Layer w30: P3.46@317.17,1225 325.28,1225 340.28,1240 341.62,1240 772.08,1670.47 R11.1@988.83,1670.47
VD33: C28.2 C29.2 C30.2 C31.2 R10.1 U2.7 U2.21 | length 1257.5
  Top Layer w8: U2.7@1287.4,1713.08 1287.4,1655.02 C31.2@1296.66,1645.76 ; U2.21@1507.87,1723.08 1507.87,1676.32 1520.45,1663.74 C29.2@1520.45,1643.87
  Top Layer w20: R10.1@1026.67,1603.72 1073.6,1603.72 1109.41,1567.9 1109.41,1566.92 1117.72,1558.61 C28.2@1118.7,1558.61 ; C28.2@1118.7,1557.93 v2(1193.65,1557.93) 1226.41,1557.93 C30.2@1227.08,1558.61 1253.59,1558.61 1265.3,1570.33 1265.3,1638.98 1273.4,1647.08 1294.15,1647.08 C31.2@1294.27,1647.2 ; v2(1520,1619) 1520,1643.43 C29.2@1520.45,1643.87
  Bottom Layer w30: v2(1193.65,1557.93) 1193.12,1558.46 1162.89,1558.46 v2(1160.9,1560.45) 1107.39,1613.96 1107.39,1695.51 1161.44,1749.56 1445.3,1749.56 1520,1674.85 v2(1520,1619)
VDDIO: C21.2 C22.2 C23.1 C24.1 C26.1 P3.45 R8.1 U2.39 U2.56 U2.83 U2.101 U2.122 | length 4816.4
  Top Layer w8: C22.2@1007.99,1880.05 1009.5,1881.55 1055.49,1881.55 1062.37,1888.43 U2.122@1122.05,1888.43 ; C21.2@1023.48,2307.64 1023.47,2285 1023.47,2264.55 1068.88,2219.14 U2.101@1122.05,2219.14 ; C26.1@1375.94,2479.74 1375.94,2477.92 1375.94,2460.1 1397.64,2438.4 U2.83@1397.64,2353 ; U2.39@1751.97,1888.43 1835.78,1888.43 1851.43,1872.78 C23.1@1877.09,1872.78 ; U2.56@1751.97,2156.15 1817.59,2156.15 1869.1,2207.66 C24.1@1882.17,2207.66
  Top Layer w20: v2(923.71,1831.46) 924.95,1831.46 939.43,1816.98 987.37,1816.98 1007.99,1837.6 C22.2@1007.99,1880.05 ; C21.2@1024.67,2307.64 v2@1024.67,2341.41 ; v2(1330.78,2531.17) 1330.78,2503.7 1356.56,2477.92 C26.1@1375.94,2477.92 ; C23.1@1877.09,1872.78 1877.09,1855.2 1902.83,1829.47 v2(1979.38,1829.47) ; C24.1@1891.13,2207.66 1891.13,2226.76 1930.06,2265.69 v2(1977.42,2265.69)
  Top Layer w22: P3.45@217.17,1225 269.16,1173.01 377.33,1173.01 638.64,1434.32 786.4,1434.32 v2(815.16,1463.09) R8.1@993.4,1463.09
  Bottom Layer w30: v2(923.71,1831.46) 834.34,1742.09 834.34,1482.27 ; v2@923.71,1840.84 923.71,2282.03 981.34,2339.65 1019.92,2339.65 v2(1021.68,2341.41) 1209.91,2529.64 v2@1323.59,2529.64 ; v2(1330.78,2531.17) 1377.92,2578.31 1731.2,2578.31 1977.42,2332.09 v2(1977.42,2265.69) 1979.14,2263.96 1979.14,1829.71 v2(1979.38,1829.47) ; 834.34,1482.27 834.34,1476.1 v2(849.45,1460.99) 817.26,1460.99 v2(815.16,1463.09) 834.34,1482.27
VREF: C25.1 P1.46 R9.1 U2.70 | length 3580.5
  Top Layer w8: U2.70@1602.36,2353 1602.36,2400.68 1610.59,2408.91 C25.1@1610.59,2427.95
  Top Layer w15: C25.1@1614.9,2432.26 1614.9,2438.28 1615.89,2439.26 1632.13,2439.26 1650.76,2457.88 1650.76,2463.16 v2(1653.24,2465.64)
  Top Layer w20: v2(925,1554.45) v2(946.04,1533.4) ; 963.32,1533.4 v2(946.04,1533.4) ; R9.1@993.4,1533.4 v2(946.04,1533.4) ; v2(2181.29,1176.62) 2182.38,1175.53 v2(2213.78,1175.53) 2607.38,1175.53 P1.46@2656.85,1225
  Bottom Layer w20: v2(2181.29,1176.62) 2181.29,1177.47 2213.78,1209.95
  Bottom Layer w30: v2(946.04,1533.4) 903.95,1575.5 903.95,1707.36 1421.33,2224.74 ; 1479.8,2283.21 1479.74,2283.15 ; v2(1653.24,2465.64) 1653.24,2456.66 1479.74,2283.15 ; v2(2181.29,1176.62) 2182.38,1175.53 v2(2213.78,1175.53) 2213.78,1209.95 2213.78,1489.6 1746.58,1956.79 1479.74,2223.63 ; 1421.33,2224.74 1449.98,2253.39 ; 1421.33,2224.74 1422.44,2223.63 1479.74,2223.63 ; 1449.98,2253.39 1479.74,2283.15 ; 1449.98,2253.39 1479.74,2223.63 ; 1479.74,2223.63 1479.74,2283.15
XI: C8.2 U2.19 Y1.1 | length 339.8
  Top Layer w8: U2.19@1476.38,1723.08 1476.38,1594.8 1460.85,1579.28 1460.85,1513.36 1503.55,1470.67 Y1.1@1507.48,1470.67 1506.97,1470.16 C8.2@1506.97,1411.56
XO: C7.2 U2.20 Y1.3 | length 334.9
  Top Layer w8: U2.20@1492.13,1723.08 1492.13,1605.71 1510.3,1587.53 1552.04,1587.53 1594.1,1545.47 Y1.3@1598.03,1545.47 1630.73,1545.47 1660.5,1515.71 C7.2@1660.5,1503.79
pads on no net: P2. P2.7 P6.5 P7.A8 P7.B8 S2.0 S2.2 U2.0 U2.1 U2.3 U2.4 U2.5 U2.8 U2.12 U2.13 U2.18 U2.23 U2.26 U2.30 U2.65 U2.66 U2.72 U2.73 U2.92 U2.108 U2.127 U2.128

## Polygon pours and split planes (outlines as drawn)
GND on Bottom Layer "GND" (hatched Horizontal grid 8 track 8, remove dead copper, pour order 0): 0,0 0,3543.31 2874.02,3543.31 2874.02,0
GND on Top Layer "GND" (hatched Horizontal grid 8 track 8, remove dead copper, pour order 1): 2874.02,0 0,0 0,3543.31 2874.02,3543.31

## Keep-outs
Keep-Out Layer:
  the board outline again, w10

## Silkscreen, mask and mechanical layers (free items; w line width, h text height)
Top Overlay:
  text "LED1" at 26.71,3409.08 h35
  text "LED2" at 385.62,3409.08 h35
  text "+5V" at 2394.37,3406.31 h35
  text "+5V" at 2721.45,3406.31 h35
  text "CH564L-R0-1v0" at 1776.38,3358.35 h40
  text "ELED2" at 1515.07,3326.36 h35 r270
  text "GND" at 50.04,3309.09 h35
  text "GND" at 385.62,3309.09 h35
  text "ELED1" at 1412.47,3308.7 h35 r270
  text "3V3" at 2394.37,3306.44 h35
  text "3V3" at 2721.45,3306.44 h35
  text "3V3" at 50.04,3209.1 h35
  text "3V3" at 385.62,3209.1 h35
  text "GND" at 2394.37,3206.58 h35
  text "GND" at 2721.45,3206.58 h35
  text "PA0" at 50.04,3109.11 h35
  text "PA1" at 385.62,3109.11 h35
  text "PD15" at 2365.22,3106.71 h35
  text "PD14" at 2721.45,3106.71 h35
  text "PA2" at 50.04,3009.12 h35
  text "PA3" at 385.62,3009.12 h35
  text "PD13" at 2365.22,3006.85 h35
  text "PD12" at 2721.45,3006.85 h35
  text "PB22" at 1316.84,2917.42 h35 r270
  text "PB16" at 1515.07,2915.34 h35 r270
  text "PB18" at 1412.47,2911.19 h35 r270
  text "PA4" at 50.04,2909.13 h35
  text "PA5" at 385.62,2909.13 h35
  text "PD11" at 2376.88,2906.98 h35
  text "PD10" at 2721.45,2906.98 h35
  text "PA6" at 50.04,2809.14 h35
  text "PA7" at 385.62,2809.14 h35
  text "PD9" at 2394.37,2807.12 h35
  text "PD8" at 2721.45,2807.12 h35
  text "PA12" at 20.88,2709.14 h35
  text "PA13" at 385.62,2709.14 h35
  text "PB20" at 2359.39,2707.25 h35
  text "PB21" at 2721.45,2707.25 h35
  text "PA14" at 20.88,2609.15 h35
  text "PA15" at 385.62,2609.15 h35
  text "PB22" at 2359.39,2607.39 h35
  text "PB19" at 2721.45,2607.39 h35
  text "PA8" at 50.04,2509.16 h35
  text "PA9" at 385.62,2509.16 h35
  text "PB18" at 2365.22,2507.52 h35
  text "PB17" at 2721.45,2507.52 h35
  text "PA10" at 20.88,2409.17 h35
  text "PA11" at 385.62,2409.17 h35
  text "PB16" at 2365.22,2407.66 h35
  text "PB7" at 2721.45,2407.66 h35
  text "PA16" at 20.88,2309.18 h35
  text "PA17" at 385.62,2309.18 h35
  text "PB6" at 2394.37,2307.79 h35
  text "PB5" at 2721.45,2307.79 h35
  text "PB9" at 848.62,2234.34 h35
  text "PB8" at 526.18,2230.56 h35
  text "PA18" at 20.88,2209.19 h35
  text "PA19" at 385.62,2209.19 h35
  text "PB4" at 2394.37,2207.93 h35
  text "PB3" at 2721.45,2207.93 h35
  text "GND" at 533.18,2137.39 h35
  text "SWCLK" at 848.62,2136.21 h35
  text "PA20" at 15.05,2109.2 h35
  text "PA21" at 385.62,2109.2 h35
  text "PB2" at 2394.37,2108.06 h35
  text "PB1" at 2721.45,2108.06 h35
  text "GND" at 533.18,2037.21 h35
  text "SWDIO" at 848.62,2036.03 h35
  text "PB8" at 50.04,2009.21 h35
  text "PB9" at 385.62,2009.21 h35
  text "PB0" at 2394.37,2008.2 h35
  text "PD31" at 2721.45,2008.2 h35
  text "GND" at 855.62,1942.85 h35
  text "3V3" at 533.18,1937.03 h35
  text "PB10" at 20.88,1909.21 h35
  text "PB11" at 385.62,1909.21 h35
  text "PD30" at 2359.39,1908.33 h35
  text "PD29" at 2721.45,1908.33 h35
  text "3V3" at 855.62,1842.68 h35
  text "3V3" at 533.18,1836.86 h35
  text "PB12" at 20.88,1809.22 h35
  text "PB13" at 385.62,1809.22 h35
  text "PD28" at 2359.39,1808.47 h35
  text "PD27" at 2721.45,1808.47 h35
  text "PB14" at 20.88,1709.23 h35
  text "PB15" at 385.62,1709.23 h35
  text "PD26" at 2359.39,1708.6 h35
  text "PD25" at 2721.45,1708.6 h35
  text "PD0" at 50.04,1609.24 h35
  text "PD1" at 385.62,1609.24 h35
  text "PD24" at 2359.39,1608.74 h35
  text "PD23" at 2721.45,1608.74 h35
  text "PD2" at 50.04,1509.25 h35
  text "PD3" at 385.62,1509.25 h35
  text "PD22" at 2359.39,1508.87 h35
  text "PD21" at 2721.45,1508.87 h35
  text "PD4" at 50.04,1409.26 h35
  text "PD5" at 385.62,1409.26 h35
  text "PD20" at 2359.39,1409.01 h35
  text "PD19" at 2721.45,1409.01 h35
  text "PD6" at 50.04,1309.27 h35
  text "PD7" at 385.62,1309.27 h35
  text "PD18" at 2365.22,1309.14 h35
  text "PD17" at 2721.45,1309.14 h35
  text "VDDIO" at 13.39,1209.27 h32
  text "V5" at 385.62,1209.27 h35
  text "PD16" at 2365.22,1209.28 h35
  text "VREF" at 2721.45,1209.28 h35
  text "GND" at 50.04,1109.28 h35
  text "GND" at 385.62,1109.28 h35
  text "GND" at 2394.37,1109.41 h35
  text "GND" at 2721.45,1109.41 h35
  text "OFF" at 1802.22,684.49 h35
  text "ON" at 1963.69,684.49 h35
Mechanical 1:
  the board outline again, w10

## Text inside footprints (layer, text, board x,y; h text height)
D0: Top Overlay "+" at 2035.99,977.67 h40 r180
D2: Top Overlay "+" at 812.61,3421.82 h40 r270
D3: Top Overlay "+" at 812.61,3353.01 h40 r270
P8: Top Overlay "D-" at 1530.35,395 h40; Top Overlay "D+" at 1620.35,395 h40; Top Overlay "V" at 1450.35,395 h40; Top Overlay "G" at 1730.35,395 h40